# Altium PCB USB_BLASTER.PcbDoc
Units mm, origin at the board's own origin, x right, y up, seen from the top; angles counter-clockwise.
Board outline 45.73 x 23.63 mm, 2 copper layers (TopLayer, BottomLayer); 4 components, 0 nets, 25 pads, 0 vias.
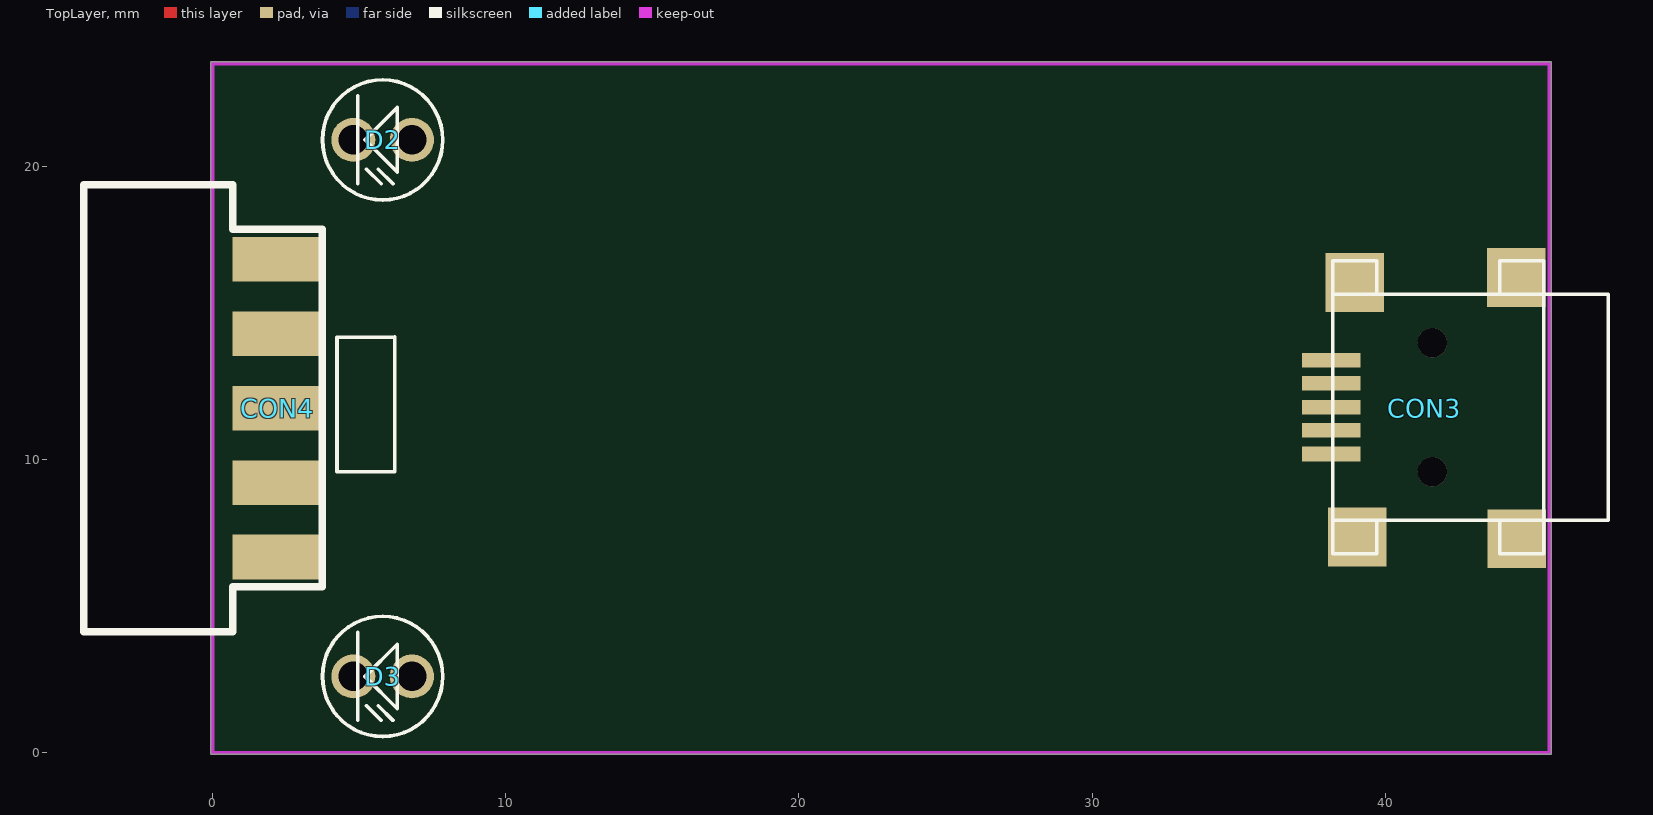
[diagram p0: TopLayer view]
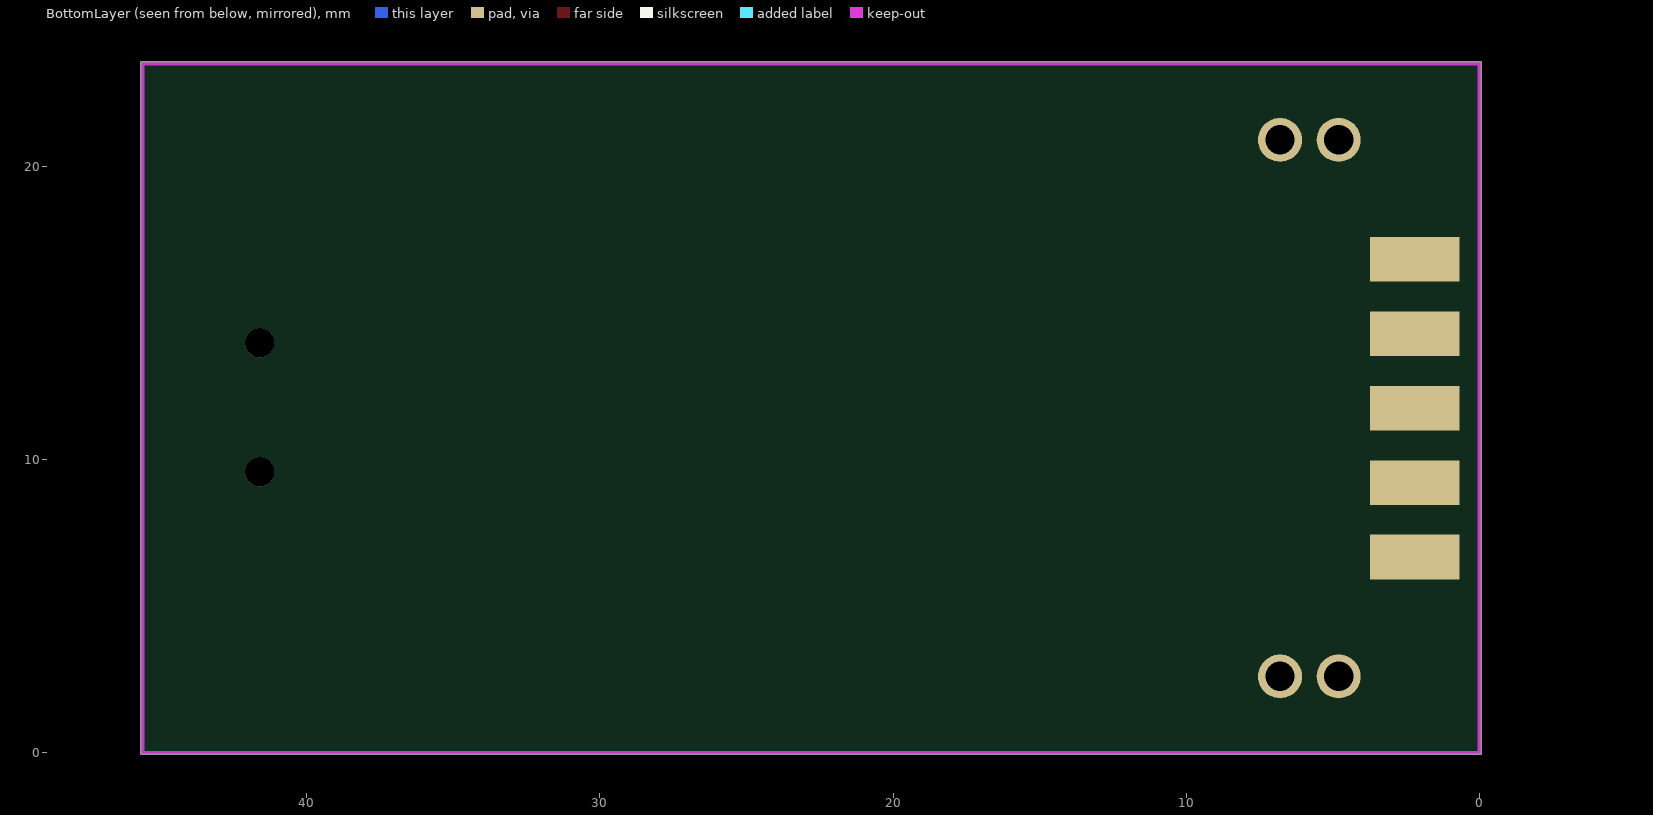
[diagram p1: BottomLayer view, seen from below]

## Layer stack, top to bottom
TopLayer: signal copper 0.0356
Dielectric: dielectric 0.32, FR-4, Dk 4.8
BottomLayer: signal copper 0.0356

## Board outline
-0.064,-0.064 45.664,-0.064 45.664,23.564 -0.064,23.564

## Design rules (kind name [scope] priority, off if disabled: settings)
Clearance [All] p1: gap=0.3
ComponentClearance [All] p1: gap=0 collisioncheckmode=3 verticalgap=0.254 showdistances=FALSE
FabricationTestPointUsage TestPointUsage [All] p1: valid=0 allowmultiple=FALSE
FabricationTestpoint Testpoint [All] p1: side=3 testpointundercomponent=TRUE minsize=1.016 maxsize=2.54 preferedsize=1.524 minholesize=0.508 maxholesize=1.016 preferedholesize=0.813 testpointgrid=0.025 allowsidetop=TRUE allowsidebottom=TRUE usegrid=TRUE gridtolerance=0
PolygonConnect [All] p1: connectstyle=Relief reliefconductorwidth=0.4 reliefentries=4 polygonreliefangle="90 Angle"
RoutingVias [All] p1: holewidth=0.4 width=0.7 viastyle="Through Hole" minholewidth=0.4 minwidth=0.7 maxholewidth=0.5 maxwidth=0.8
SilkscreenOverComponentPads [All] p1: minsilkscreentomaskgap=0.254
SolderMaskExpansion [All] p1: expansion=0.102
Width [All] p1: maxlimit=1 minlimit=0.25 preferedwidth=0.6
24 further rules are at their usual default settings.

## Components (designator, comment, footprint, x,y, rotation, side; value= is the part's Value field where it differs from the comment)
CON3 "USB" MINIUSB 41.32,11.75 r270 top locked
CON4 "HEADER 5X2" HEADER5X2 2.21,11.75 r180 top locked
D2 "LED" LED 5.8,20.9 r180 top
D3 "LED" LED 5.8,2.6 r180 top

## Footprints (in the part's own frame and the unit in brackets; to place one, negate y for a bottom-side part, rotate by r counter-clockwise, add the part's x,y. Pads: shape width x height; smd on the part's side, far side on the other; paste and mask are expansions set on the pad)
HEADER5X2 [mil]
  rect 120x60 smd: 1(0,200) 3(0,100) 5(0,0) 7(0,-100) 9(0,-200)
  rect 120x60 smd far side: 2(0,200) 4(0,100) 6(0,0) 8(0,-100) 10(0,-200)
  silkscreen extent -60,-300 260,300
LED [mm]
  round 1.5 hole 1: 1(-1,0) 2(1,0)
  silkscreen extent -2.05,-2.05 2.05,2.05
MINIUSB [mm]
  round 1 hole 1: 0(-2.23,0.281) 0(2.17,0.281)
  rect 0.5x2 smd: 1(-1.635,-3.16) 2(-0.848,-3.16) 3(-0.035,-3.16) 4(0.752,-3.16) 5(1.565,-3.16)
  rect 2x2 smd: 6(4.395,-2.28) 7(4.455,3.16) 8(-4.455,3.14) 9(-4.285,-2.36)
  silkscreen extent -5.03,-3.12 4.97,6.28

## Nets (pads, with @x,y where several pads share a name; then routed paths per layer and width w, separated by ;. In a path a pad name is that pad's centre, name@x,y a point inside that pad or via, vN(x,y) a via of type N, cw(c..) or ccw(c..) an arc to the next point about the centre after c; other vN are vias at no path point)
pads on no net: CON3.0 CON3.1 CON3.2 CON3.3 CON3.4 CON3.5 CON3.6 CON3.7 CON3.8 CON3.9 CON4.1 CON4.2 CON4.3 CON4.4 CON4.5 CON4.6 CON4.7 CON4.8 CON4.9 CON4.10 D2.1 D2.2 D3.1 D3.2

## Polygon pours and split planes (outlines as drawn)
no net on TopLayer "TopLayer-No Net" (hatched 90Degree grid 0.3 track 0.3, remove dead copper, pour order 1000): 391.918,151.515 391.918,159.512 393.087,160.68 393.7,160.68

## Keep-outs
KeepOutLayer:
  lines w0.127: 0,0 0,23.5 45.6,23.5 45.6,0 0,0

## Silkscreen, mask and mechanical layers (free items; w line width, h text height)
TopOverlay:
  lines w0.127: 6.2,14.17 4.24,14.17 4.24,9.58 6.21,9.58 6.21,14.18